# EAGLE board mk2i (EAGLE 6.4)
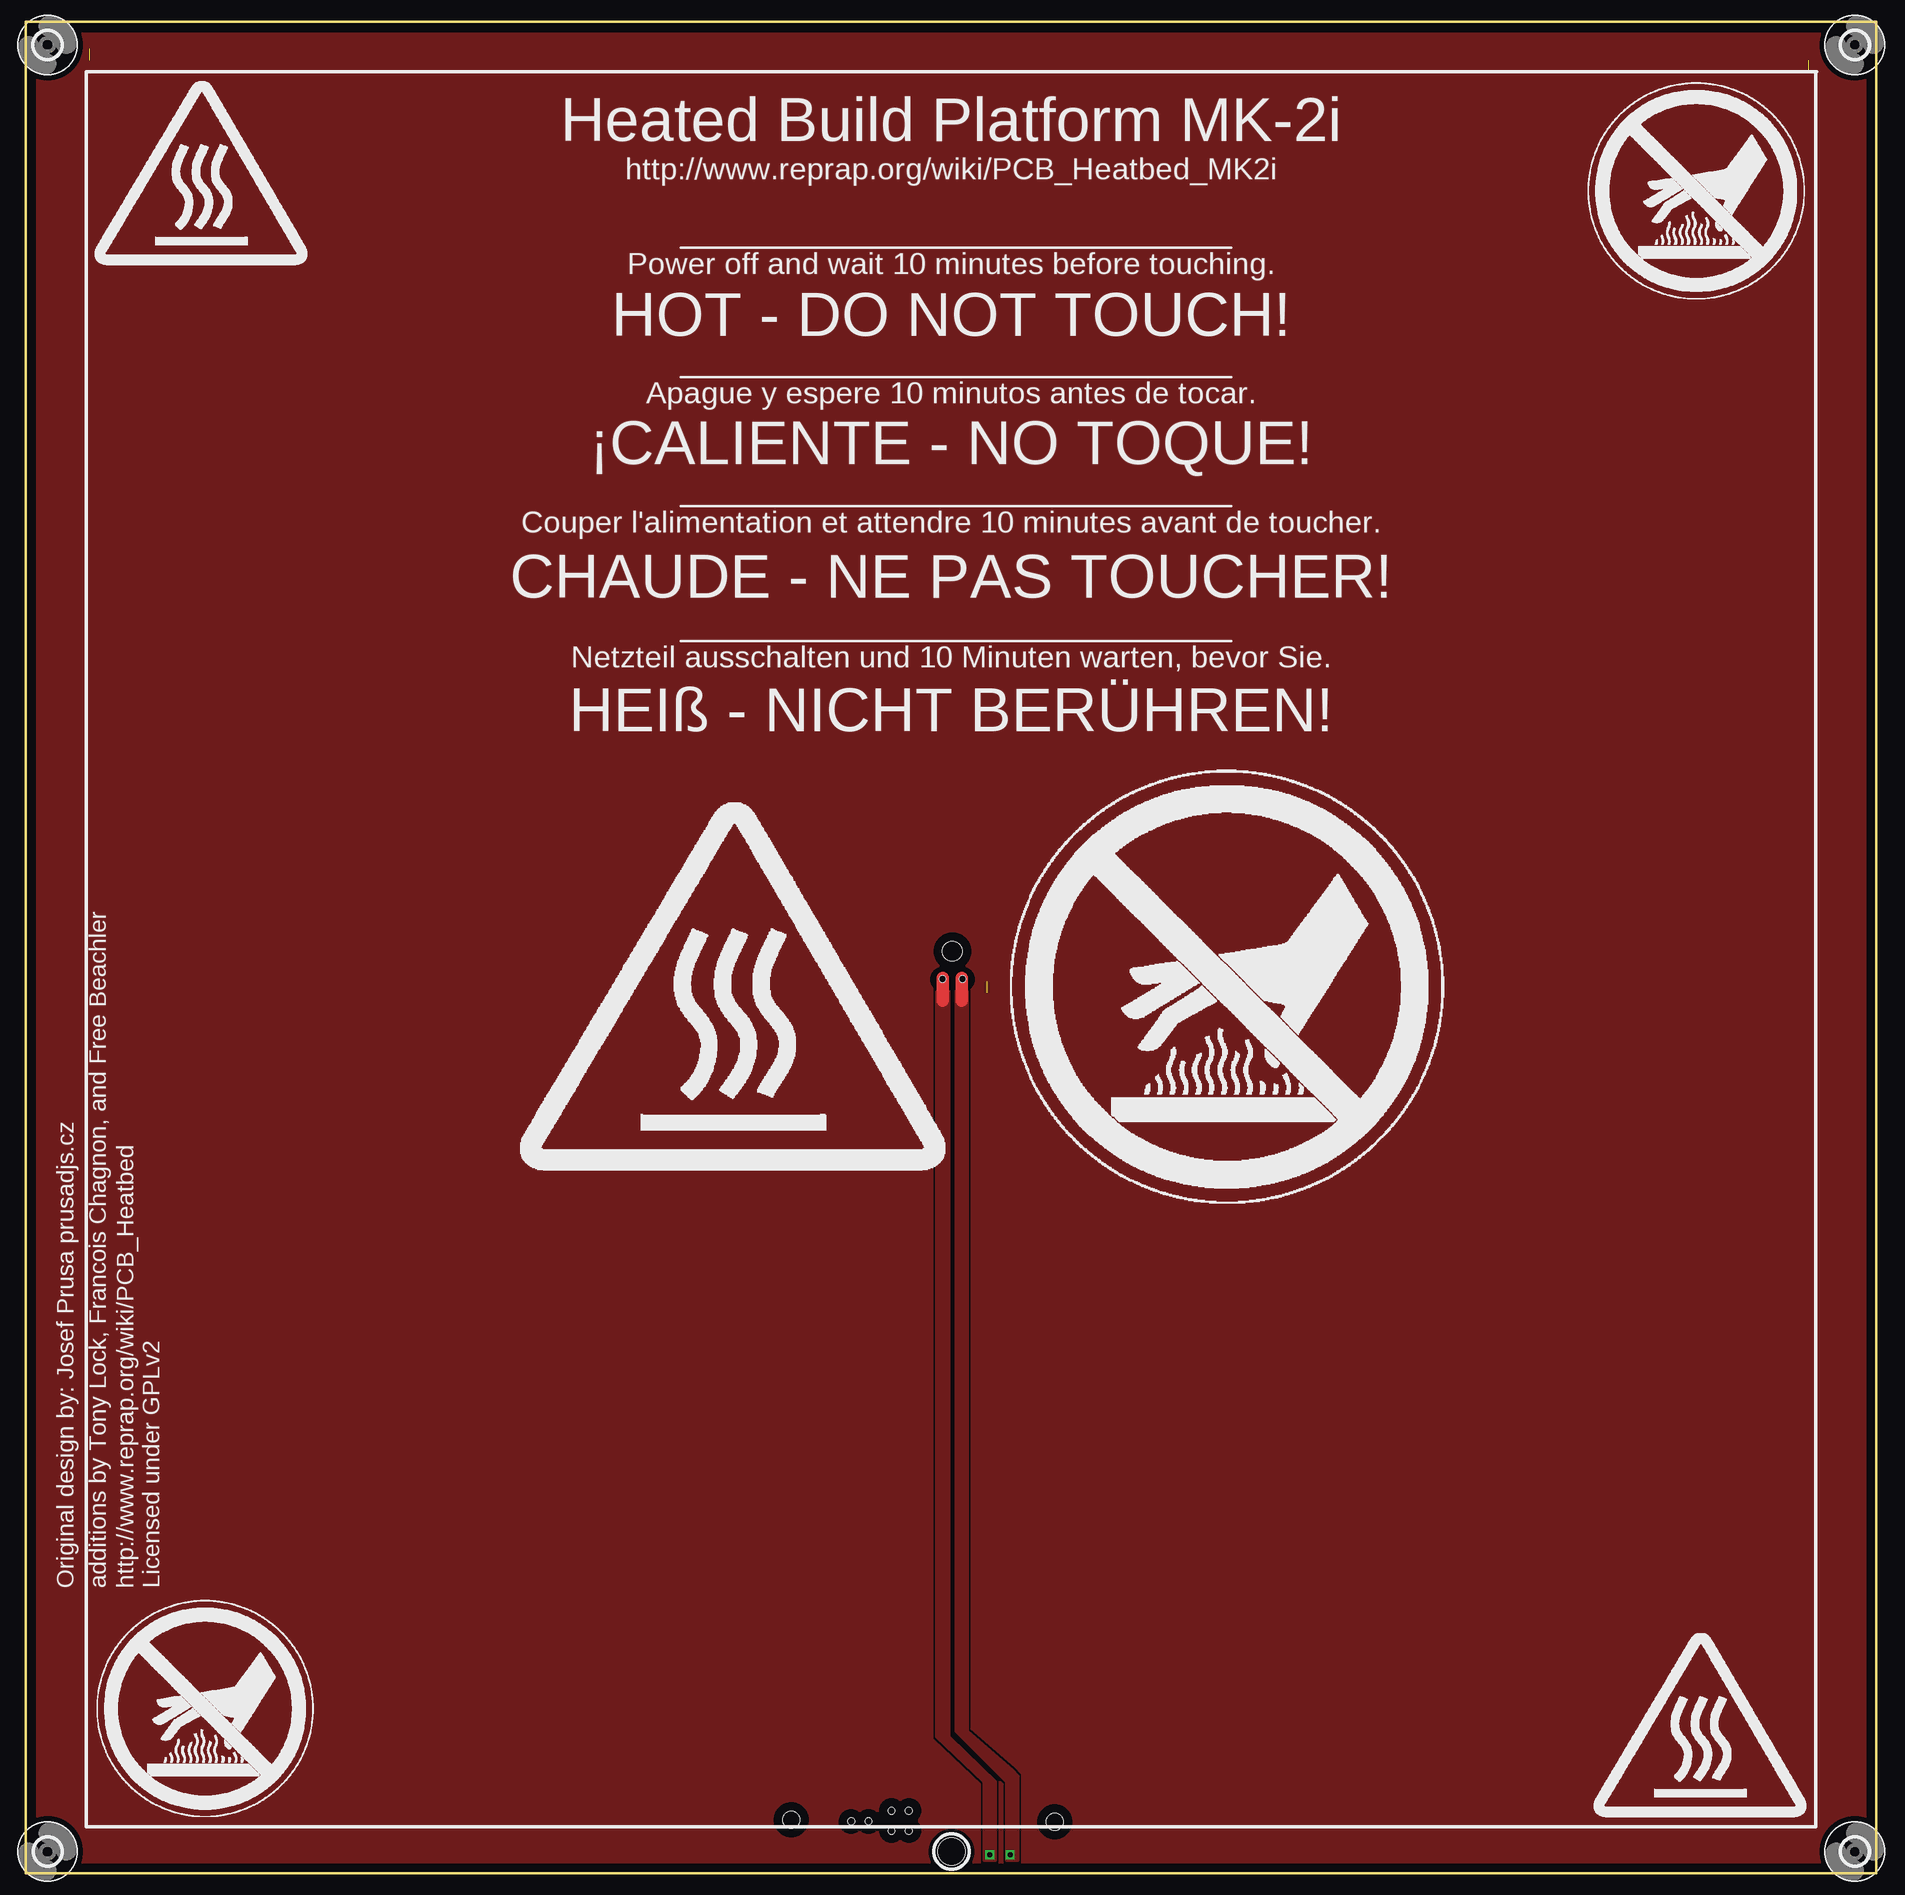
[diagram p0: board, top side]
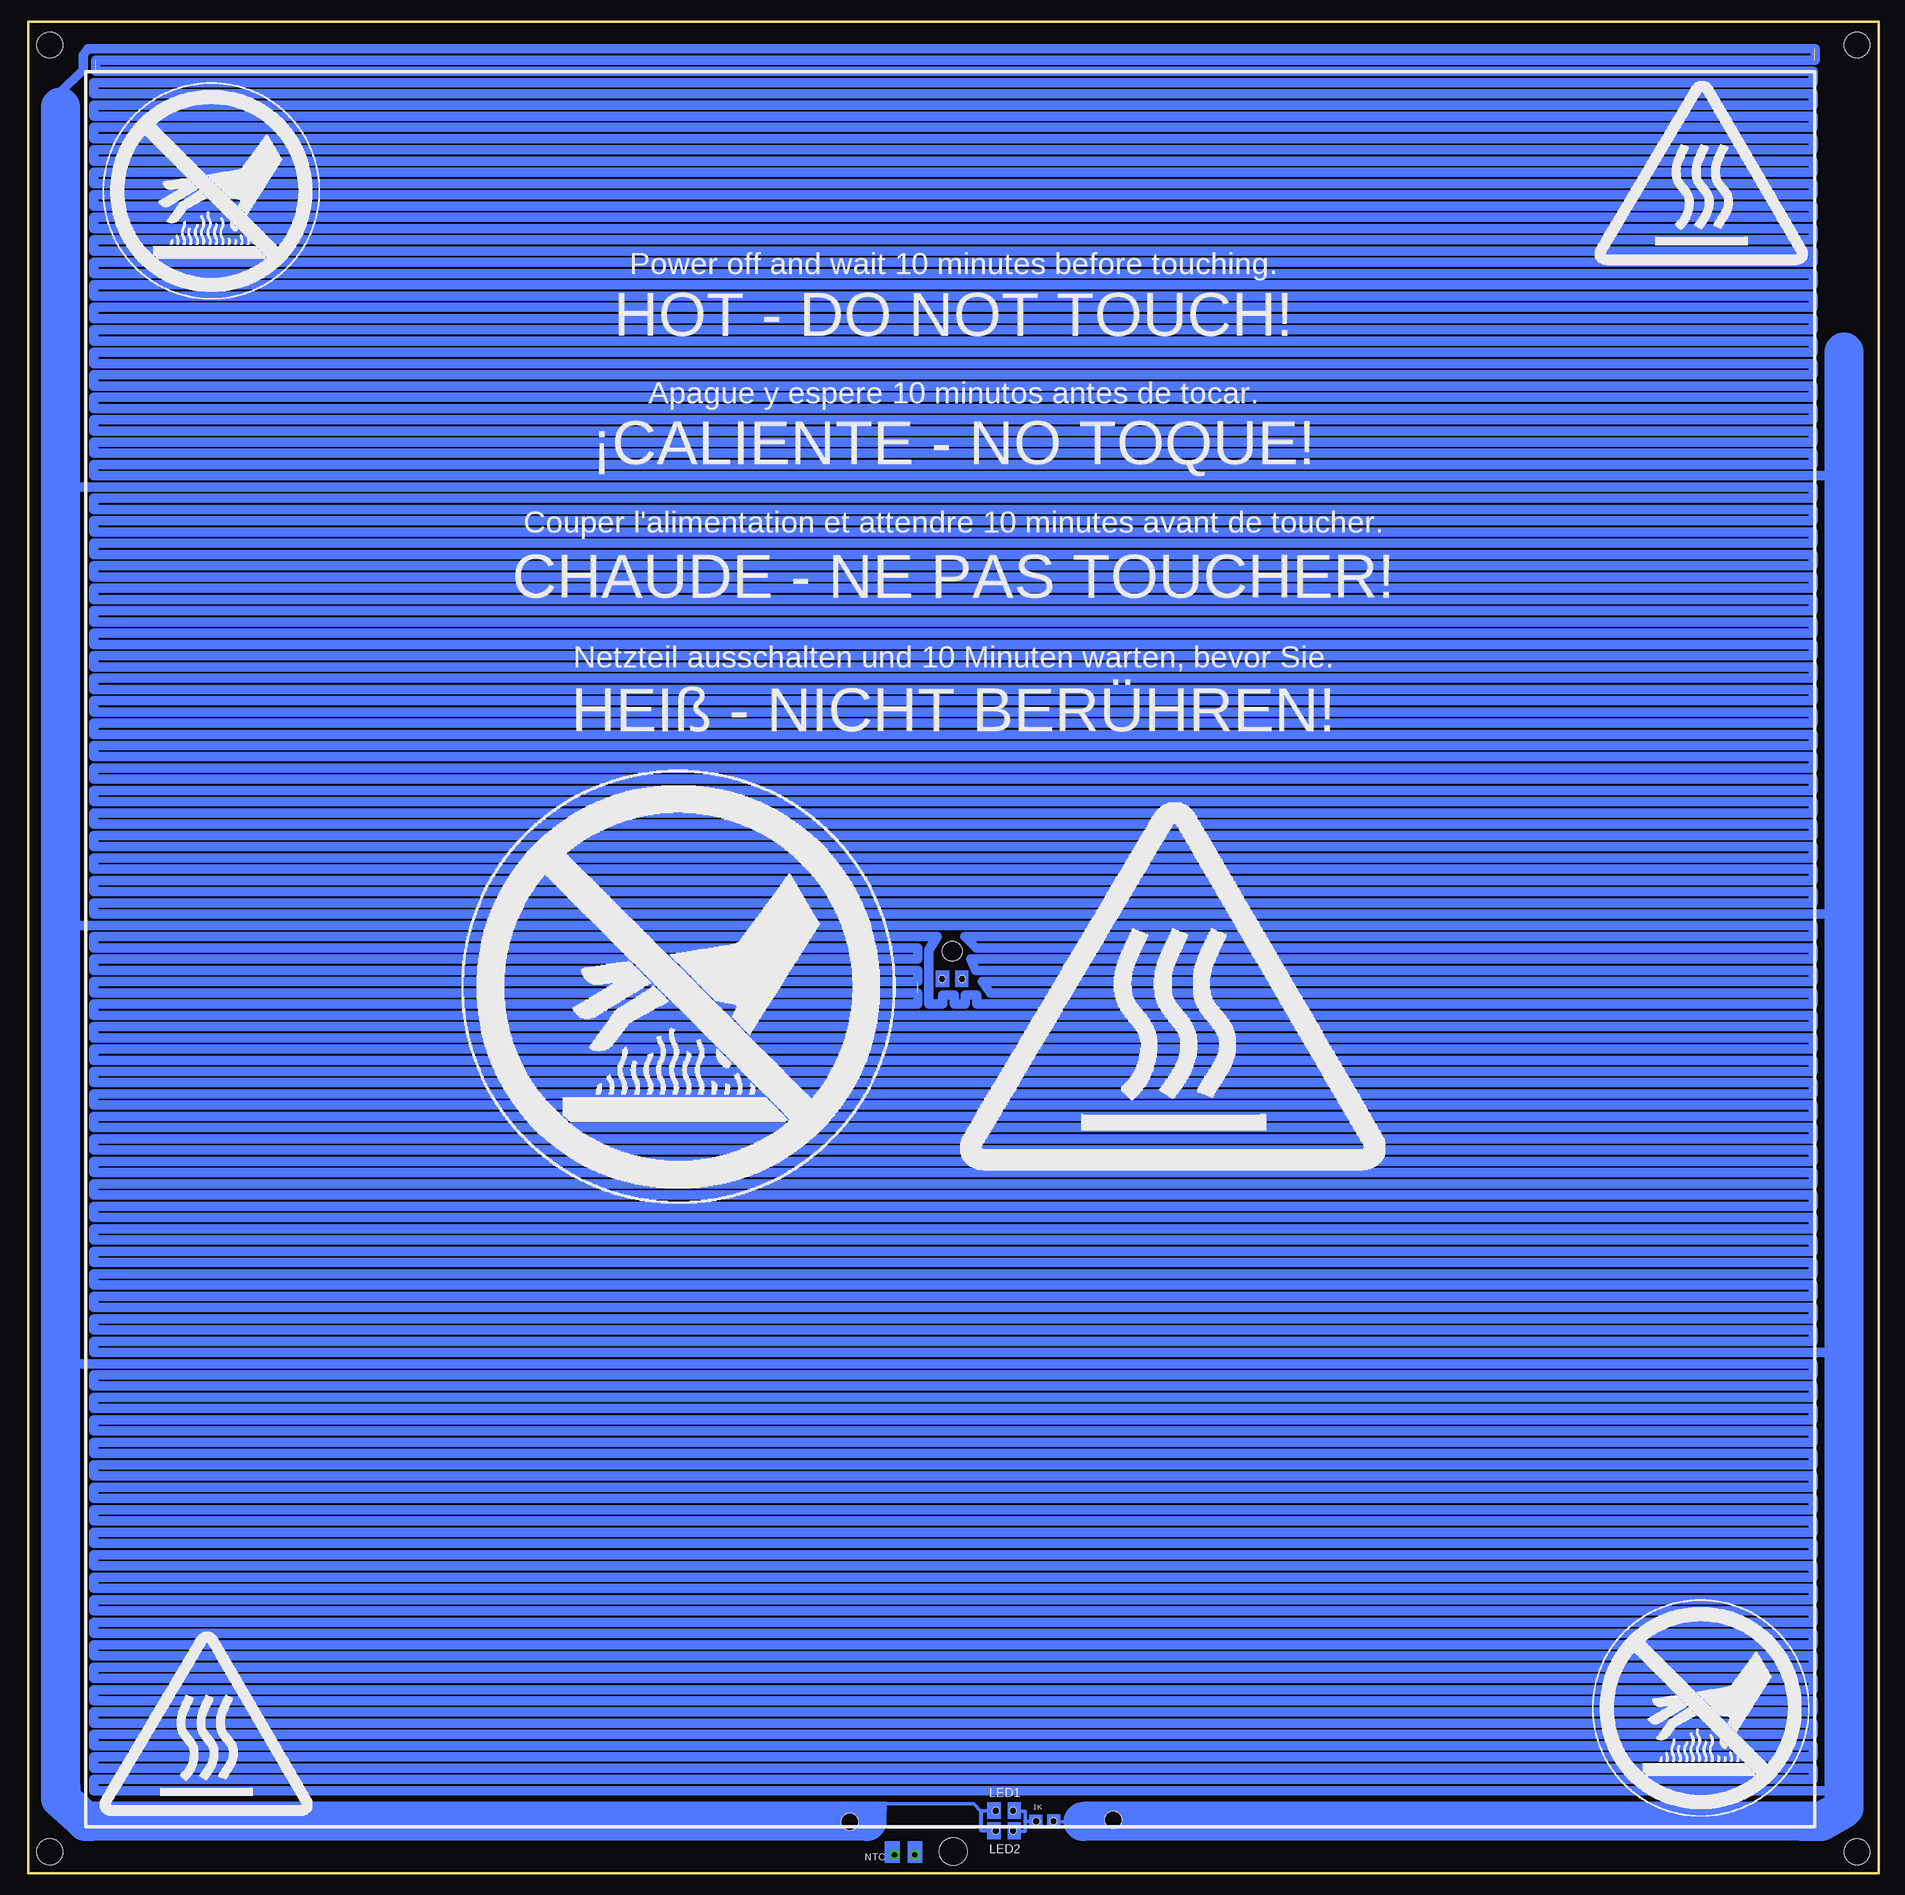
[diagram p1: board, bottom side, seen from below]

Size 214 x 214.19 mm. Coordinates in mm from the lower left corner, seen from the top.
Outline: 0,214 0,0 214,0 214,214
Outline: 0,214.19 214,214.19
Copper layers (1*16): Top 0.035mm / dielectric 1.5mm / Bottom 0.035mm
Design rules "default": minimum track width 10mil, minimum drill 24mil, track to track 8mil, track to pad 8mil, pad to pad 8mil, via to via 8mil, smd to smd 8mil, copper to edge 40mil, drill to drill 8mil, minimum pad ring 10mil, minimum via ring 8mil, stop-mask expansion 4mil, vias tented up to drill 0mil, thermal gap 10mil
Holes 2.3 mm at 107.14,106.64 107.14,106.64
Holes 0.8 mm at 97.44,6 95.44,6 100.11,7.24 102.11,7.24 100.11,4.92 102.11,4.92 108.32,103.44 106.01,103.44
Holes 3.2 mm at 107.03,2.5
Holes 2 mm at 119,5.96 88.51,6.18

## Footprints (pad centres in the part's own frame; a part is rotated, then mirrored left to right if it is on the bottom)
3,0 = hole 3: 0,0

## Placement (x,y rotation side)
E$1  [3,0]  211.5,2.5 0 top
E$2  [3,0]  2.5,2.5 0 top
E$3  [3,0]  2.5,211.5 0 top
E$4  [3,0]  211.5,211.5 0 top
E$6  [HOT_DONT_TOUCH_XLG]  113.82,77.48 0 top
E$7  [HOT_XLG]  56.66,77.48 0 top
E$8  [HOT_LG]  33.06,184.13 0 bottom
E$9  [HOT_DONT_TOUCH_LG]  205.35,182.09 0 bottom
E$10  [HOT_LG]  7.71,184.13 0 top
E$11  [HOT_LG]  181.07,4.6 0 top
E$12  [HOT_DONT_TOUCH_LG]  180.65,182.09 0 top
E$13  [HOT_DONT_TOUCH_LG]  8.19,6.52 0 top
E$14  [HOT_LG]  205.96,4.73 0 bottom
E$15  [HOT_DONT_TOUCH_LG]  33.1,6.59 0 bottom
E$16  [HOT_XLG]  106.71,77.48 0 bottom
E$17  [HOT_DONT_TOUCH_XLG]  163.87,77.48 0 bottom

## Library data of the parts
E$1-E$4 = holes
E$6-E$17 = MK2i

## Tracks (layer width: path | path; a pad name or v marks a point on that pad's centre or on a via)
S$1
  Bottom 0.406: 103.8,7.19 103.85,7.19 104.68,8.02 116.18,8.02 116.21,8.05
S$2
  Bottom 0.305: 103.91,4.97 103.11,4.97
S$3
  Bottom 4.5: 7.5,6 92,6
S$4
  Bottom 4.5: 117,6 206.7,6
S$5
  Bottom 1.1: 4.05,9.55 206.45,9.55 206.45,10.85 7.55,10.85 7.55,12.15 206.45,12.15 206.45,13.45 7.55,13.45 7.55,14.75 206.45,14.75 206.45,16.05 7.55,16.05 7.55,17.35 206.45,17.35 206.45,18.65 7.55,18.65 7.55,19.95 206.45,19.95 206.45,21.25 7.55,21.25 7.55,22.55 206.45,22.55 206.45,23.85 7.55,23.85 7.55,25.15 206.45,25.15 206.45,26.45 7.55,26.45 7.55,27.75 206.45,27.75 206.45,29.05 7.55,29.05 7.55,30.35 206.45,30.35 206.45,31.65 7.55,31.65 7.55,32.95 206.45,32.95 206.45,34.25 7.55,34.25 7.55,35.55 206.45,35.55 206.45,36.85 7.55,36.85 7.55,38.15 206.45,38.15 206.45,39.45 7.55,39.45 7.55,40.75 206.45,40.75 206.45,42.05 7.55,42.05 7.55,43.35 206.45,43.35 206.45,44.65 7.55,44.65 7.55,45.95 206.45,45.95 206.45,47.25 7.55,47.25 7.55,48.55 206.45,48.55 206.45,49.85 7.55,49.85 7.55,51.15 206.45,51.15 206.45,52.45 7.55,52.45 7.55,53.75 206.45,53.75 206.45,55.05 7.55,55.05 7.55,56.35 206.45,56.35 206.45,57.65 7.55,57.65 7.55,58.95 209.95,58.95
S$6
  Bottom 1.1: 206.57,160.35 209.87,160.35
S$7
  Bottom 4.5: 4,8.5 4,176
S$8
  Bottom 0.305: 103.11,7.29 103.91,7.29 103.91,6.19
S$9
  Bottom 4.5: 8.87,6 6.67,6 4,7.54 4,10.29
S$10
  Bottom 0.406: 103.13,4.91 103.79,4.91
S$11
  Bottom 0.406: 98.73,4.83 99.56,4.83
S$12
  Bottom 1.1: 4.05,110.95 206.45,110.95 206.45,112.25 7.55,112.25 7.55,113.55 206.45,113.55 206.45,114.85 7.55,114.85 7.55,116.15 206.45,116.15 206.45,117.45 7.55,117.45 7.55,118.75 206.45,118.75 206.45,120.05 7.55,120.05 7.55,121.35 206.45,121.35 206.45,122.65 7.55,122.65 7.55,123.95 206.45,123.95 206.45,125.25 7.55,125.25 7.55,126.55 206.45,126.55 206.45,127.85 7.55,127.85 7.55,129.15 206.45,129.15 206.45,130.45 7.55,130.45 7.55,131.75 206.45,131.75 206.45,133.05 7.55,133.05 7.55,134.35 206.45,134.35 206.45,135.65 7.55,135.65 7.55,136.95 206.45,136.95 206.45,138.25 7.55,138.25 7.55,139.55 206.45,139.55 206.45,140.85 7.55,140.85 7.55,142.15 206.45,142.15 206.45,143.45 7.55,143.45 7.55,144.75 206.45,144.75 206.45,146.05 7.55,146.05 7.55,147.35 206.45,147.35 206.45,148.65 7.55,148.65 7.55,149.95 206.45,149.95 206.45,151.25 7.55,151.25 7.55,152.55 206.45,152.55 206.45,153.85 7.55,153.85 7.55,155.15 206.45,155.15 206.45,156.45 7.55,156.45 7.55,157.75 206.45,157.75 206.45,159.05 7.55,159.05 7.55,160.35 206.65,160.35
S$13
  Bottom 1.1: 111.27,100.55 206.45,100.55 206.45,99.25 7.55,99.25 7.55,97.95 206.45,97.95 206.45,96.65 7.55,96.65 7.55,95.35 206.45,95.35 206.45,94.05 7.55,94.05 7.55,92.75 206.45,92.75 206.45,91.45 7.55,91.45 7.55,90.15 206.45,90.15 206.45,88.85 7.55,88.85 7.55,87.55 206.45,87.55 206.45,86.25 7.55,86.25 7.55,84.95 206.45,84.95 206.45,83.65 7.55,83.65 7.55,82.35 206.45,82.35 206.45,81.05 7.55,81.05 7.55,79.75 206.45,79.75 206.45,78.45 7.55,78.45 7.55,77.15 206.45,77.15 206.45,75.85 7.55,75.85 7.55,74.55 206.45,74.55 206.45,73.25 7.55,73.25 7.55,71.95 206.45,71.95 206.45,70.65 7.55,70.65 7.55,69.35 206.45,69.35 206.45,68.05 7.55,68.05 7.55,66.75 206.45,66.75 206.45,65.45 7.55,65.45 7.55,64.15 206.45,64.15 206.45,62.85 7.55,62.85 7.55,61.55 206.45,61.55 206.45,60.25 4.05,60.25
S$15
  Bottom 0.406: 103.78,5.04 103.79,5.04 103.79,7.23 103.13,7.23
S$16
  Bottom 1.1: 210.27,134.74 210.27,134.09 | 210.27,93.14 210.27,92.49 | 210.27,51.54 210.27,50.89
  Bottom 4.5: 210.27,204.29 210.27,134.09 210.27,92.49 210.27,50.89 210.27,9.29
S$17
  Bottom 1.1: 7.55,108.35 7.55,109.65 209.95,109.65
S$18
  Bottom 0.305: 103.91,6.09 103.91,4.99
S$19  (3 unrouted)
  Bottom 1.1: 7.55,208.45 7.55,207.15 206.45,207.15 206.45,205.85 7.55,205.85 7.55,204.55 206.45,204.55 206.45,203.25 7.55,203.25 7.55,201.95 206.45,201.95 206.45,200.65 7.55,200.65 7.55,199.35 206.45,199.35 206.45,198.05 7.55,198.05 7.55,196.75 206.45,196.75 206.45,195.45 7.55,195.45 7.55,194.15 206.45,194.15 206.45,192.85 7.55,192.85 7.55,191.55 206.45,191.55 206.45,190.25 7.55,190.25 7.55,188.95 206.45,188.95 206.45,187.65 7.55,187.65 7.55,186.35 206.45,186.35 206.45,185.05 7.55,185.05 7.55,183.75 206.45,183.75 206.45,182.45 7.55,182.45 7.55,181.15 206.45,181.15 206.45,179.85 7.55,179.85 7.55,178.55 206.45,178.55 206.45,177.25 7.55,177.25 7.55,175.95 206.45,175.95 206.45,174.65 7.55,174.65 7.55,173.35 206.45,173.35 206.45,172.05 7.55,172.05 7.55,170.75 206.45,170.75 206.45,169.45 7.55,169.45 7.55,168.15 206.45,168.15 206.45,166.85 7.55,166.85 7.55,165.55 206.45,165.55 206.45,164.25 7.55,164.25 7.55,162.95 206.45,162.95 206.45,161.65 4.05,161.65 | 206.19,208.45 7.6,208.45 | 206.19,209.75 7.37,209.75 | 207.12,211.05 7.4,211.05
S$20
  Bottom 1.1: 7.55,108.35 105.7,108.35 104.35,107.05 7.55,107.05 7.55,105.75 105,105.75 104.4,104.45 7.55,104.45
S$21
  Bottom 1.1: 207.12,211.05 207.67,210.29 207.67,208.64 210.42,205.89 210.42,204.79
S$22
  Bottom 4.5: 210.27,10.29 210.27,8.64 207.37,6 207.12,6
S$24
  Bottom 1.1: 206.45,104.45 206.45,105.75
S$25
  Bottom 1.1: 109.85,104.19 109.85,100.55 108.22,100.55 108.22,101.59 106.92,101.59 106.92,100.55 105.62,100.55 105.62,101.59 104.32,101.59 104.32,100.55
S$26
  Bottom 1.1: 206.45,108.35 206.45,107.05
S$27
  Bottom 1.1: 206.45,105.75 111.15,105.75
S$28
  Bottom 1.1: 7.55,104.45 7.55,103.15 103.62,103.15
S$29
  Bottom 1.1: 206.45,108.35 108.87,108.35
S$30
  Bottom 1.1: 206.45,104.45 111.15,104.45
S$31
  Bottom 1.1: 206.45,103.15 111.15,103.15
S$32
  Bottom 1.1: 109.85,103.15 109.85,105.75
S$33
  Bottom 1.1: 111.15,107.05 112.55,107.05 205.05,107.05 206.45,107.05
S$34
  Bottom 1.1: 111.15,105.75 111.15,107.05
S$35  (1 unrouted)
  Bottom 1.1: 111.15,103.15 111.15,104.45 | 111.15,100.55 111.15,101.85
S$36
  Bottom 1.1: 206.45,103.15 206.45,101.85
S$37
  Bottom 0.406: 94.16,5.98 94.92,5.98 94.92,5.97
S$38
  Bottom 0.406: 98.73,6 97.94,6 | 98.73,6 98.74,6 | 98.73,7.13 98.73,6
S$39
  Bottom 0.406: 98.73,7.15 99.56,7.15
S$40
  Bottom 0.406: 98.72,6.05 98.72,4.96
S$41
  pour Top (rank 6): 0.32,213.39 213.52,213.39 213.52,0.19 0.32,0.19
S$42  (via drill 0.6)
  Top 1.422: 106.04,103.54 106.04,100.94
  other vias: 111.47,2.14
  pour Top: 106.72,104.19 106.72,15.79 112.12,10.59 112.12,1.49 110.82,1.49 110.82,10.59 105.32,15.79 105.32,104.19
S$43  (via drill 0.6)
  Top 1.422: 108.22,103.54 108.22,100.94
  other vias: 113.82,2.14
  pour Top: 107.57,104.19 107.57,16.44 113.42,10.59 113.42,1.49 114.72,1.49 114.72,11.24 114.07,11.89 108.87,16.44 108.87,104.19
S$44
  Bottom 1.1: 111.37,101.85 206.45,101.85
S$45
  Bottom 1.1: 102.77,101.85 7.55,101.85 7.55,100.55 104.32,100.55
S$46
  Bottom 1.1: 7.35,209.75 7.35,211.05
S$47
  Bottom 1.1: 206.19,209.75 206.19,208.45
S$48
  Bottom 1.1: 102.77,101.85 103.67,103.15
S$49
  Bottom 1.1: 109.85,105.49 109.85,106.79 108.87,108.35
(copper drawn outside any net)
  shapes: Bottom area x11

## Text on the board
bPlace: Power off and wait 10 minutes before touching. | HOT - DO NOT TOUCH! | Apague y espere 10 minutos antes de tocar. | ¡CALIENTE - NO TOQUE! | Couper l'alimentation et attendre 10 minutes avant de toucher. | CHAUDE - NE PAS TOUCHER! | Netzteil ausschalten und 10 Minuten warten, bevor Sie. | HEIß - NICHT BERÜHREN! | LED1 | 1K | LED2 | NTC
tNames: Heated Build Platform MK-2i | http://www.reprap.org/wiki/PCB_Heatbed_MK2i | Original design by: Josef Prusa prusadjs.cz | additions by Tony Lock, Francois Chagnon, and Free Beachler | http://www.reprap.org/wiki/PCB_Heatbed | Licensed under GPLv2
tPlace2: Power off and wait 10 minutes before touching. | HOT - DO NOT TOUCH! | Apague y espere 10 minutos antes de tocar. | ¡CALIENTE - NO TOQUE! | Couper l'alimentation et attendre 10 minutes avant de toucher. | CHAUDE - NE PAS TOUCHER! | Netzteil ausschalten und 10 Minuten warten, bevor Sie. | HEIß - NICHT BERÜHREN!